# Altium PCB PCB.PcbDoc
Units mm, origin at the board's own origin, x right, y up, seen from the top; angles counter-clockwise.
Board outline 53.52 x 43.69 mm, 2 copper layers (Top Layer, Bottom Layer); 17 components, 12 nets, 45 pads, 0 vias.
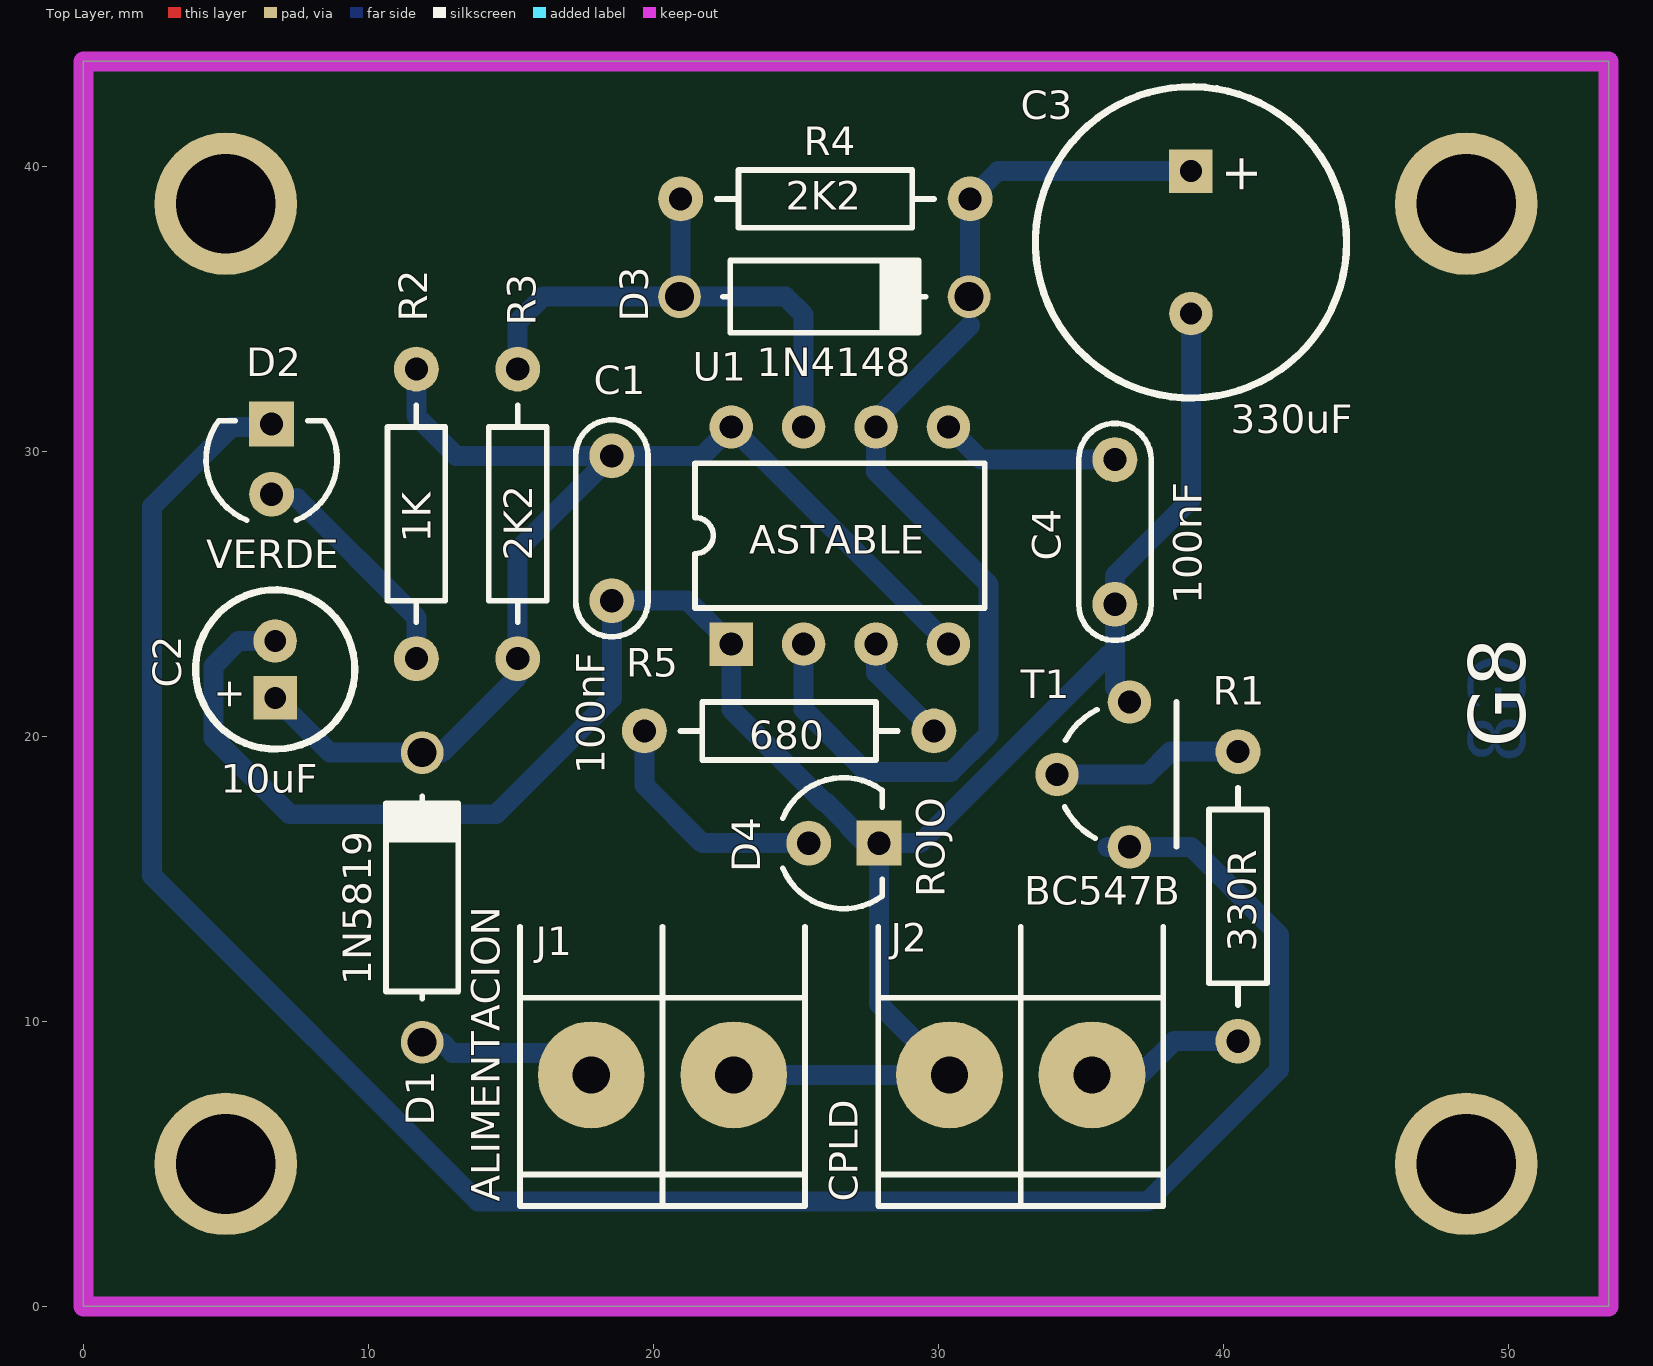
[diagram p0: Top Layer view]
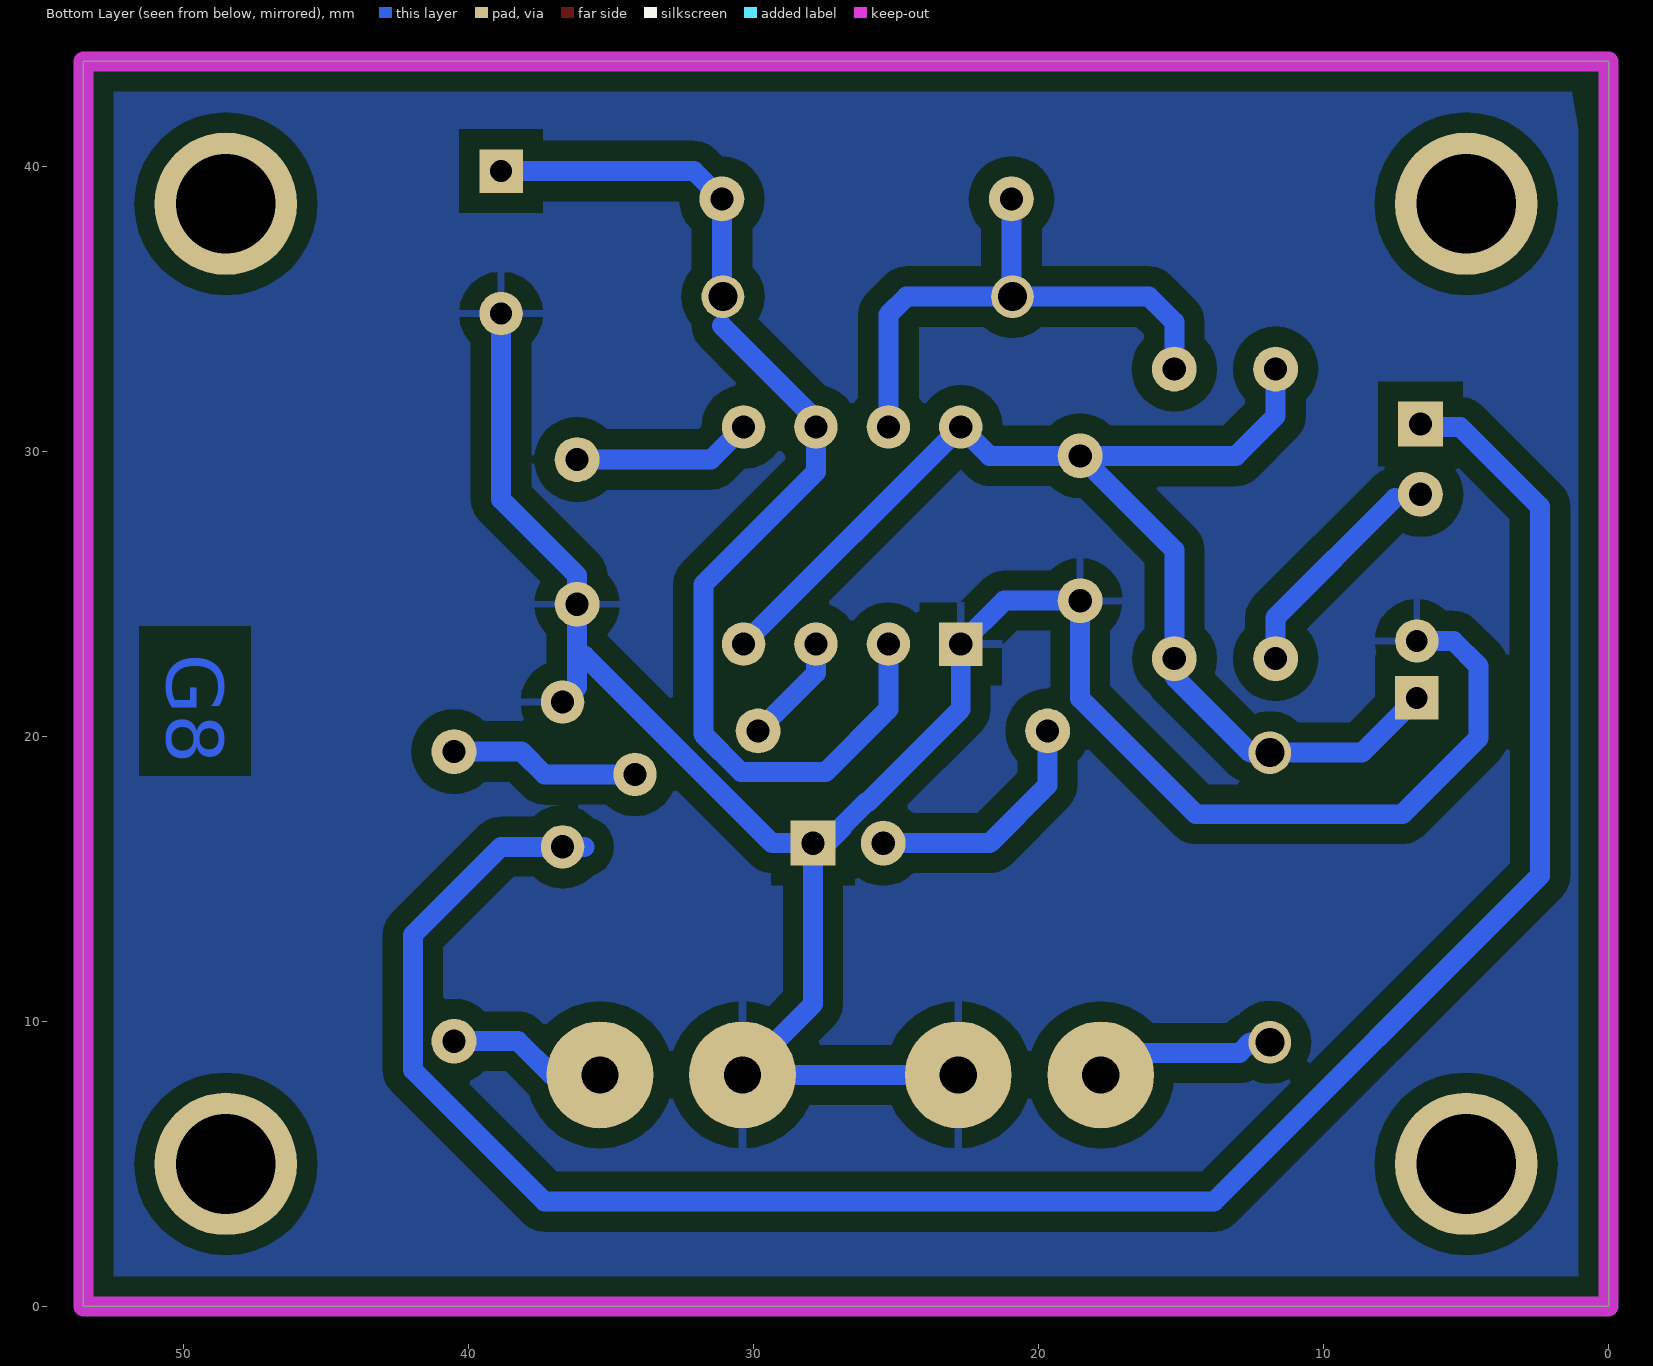
[diagram p1: Bottom Layer view, seen from below]
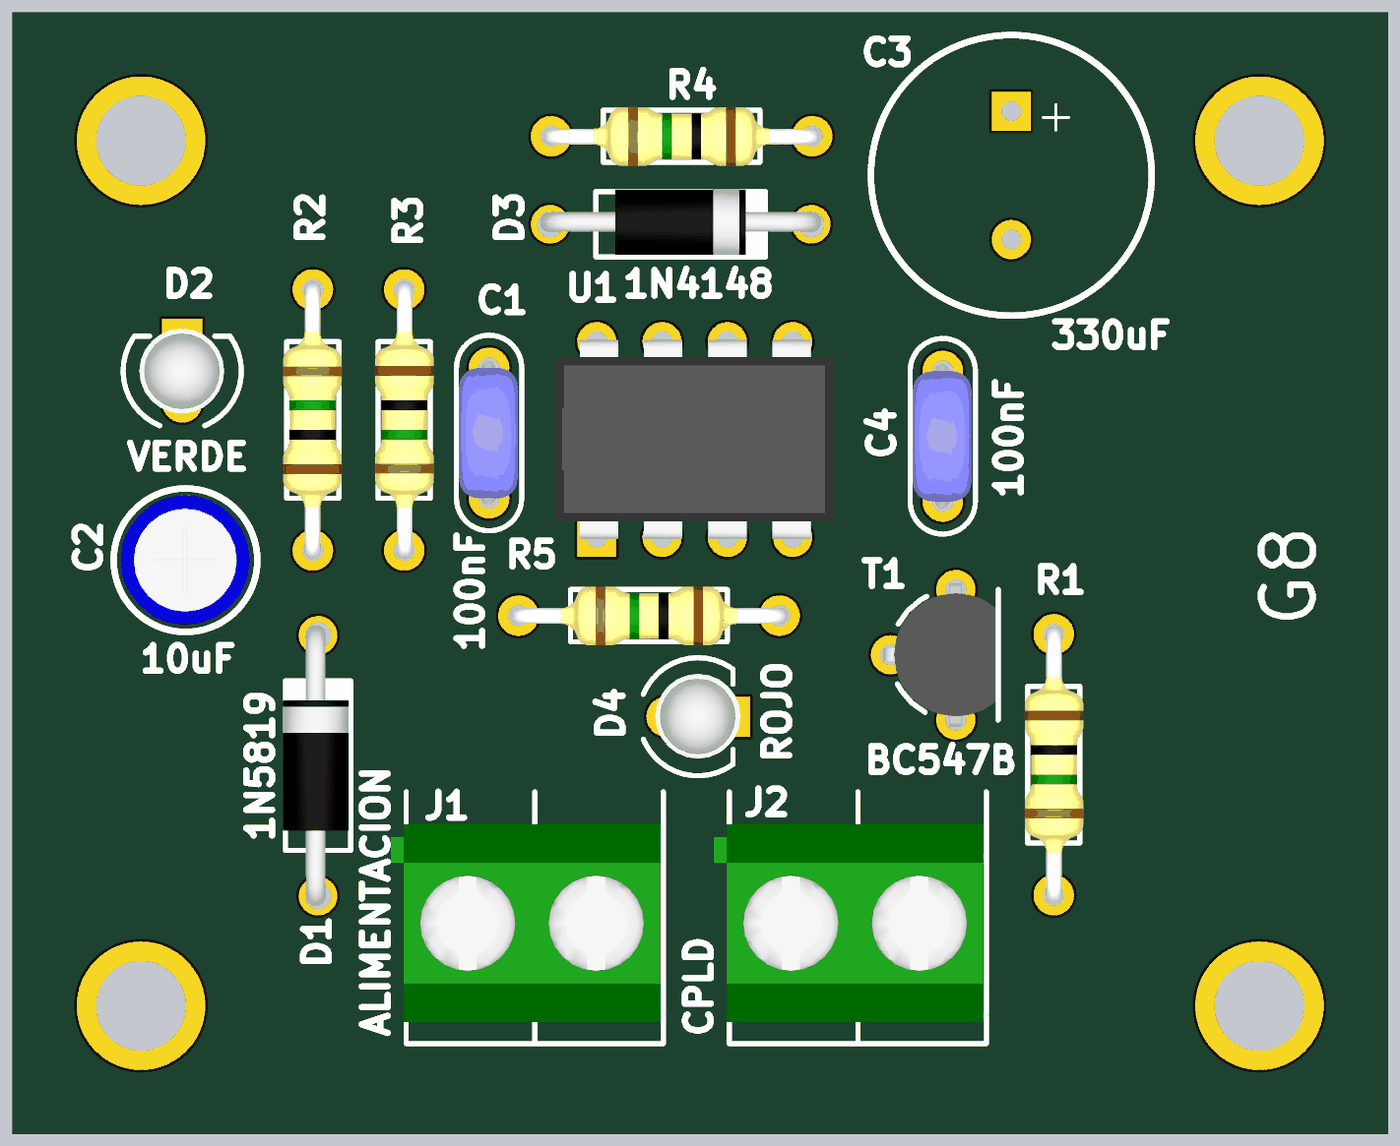
[diagram p2: 3D render of the assembled board from above, using the file's embedded part models]

## Layer stack, top to bottom
Top Layer: signal copper 0.0356
Dielectric: dielectric 0.32, FR-4, Dk 4.8
Bottom Layer: signal copper 0.0356

## Board outline
0,0 0,43.688 53.518,43.688 53.518,0

## Design rules (kind name [scope] priority, off if disabled: settings)
Clearance POLYGON [InPolygon] p1: gap=0.7
Clearance Clearance_1 [All] p2: gap=0.3
PolygonConnect [All] p1: connectstyle=Relief reliefconductorwidth=0.254 reliefentries=4 polygonreliefangle="90 Angle"
RoutingVias [All] p1: holewidth=0.711 width=1.27 viastyle="Through Hole" minholewidth=0.711 minwidth=1.27 maxholewidth=0.711 maxwidth=1.27
SilkscreenOverComponentPads SilkToSolderMaskClearance [IsPad] p1: minsilkscreentomaskgap=0.254
SolderMaskExpansion [All] p1: expansion=0.102
Width [All] p1: maxlimit=0.7 minlimit=0.254 preferedwidth=0.7 toplayer_maxwidth=0.254 toplayer_prefwidth=0.254 bottomlayer_minwidth=0.7 minimp=50.000000 maximp=50.000000 favimp=50.000000
27 further rules are at their usual default settings.

## Components (designator, comment, footprint, x,y, rotation, side; value= is the part's Value field where it differs from the comment)
C1 "100nF" CAP200 18.542,27.305 r270 top
C2 "10uF" CAP100RP 6.731,22.352 r90 top
C3 "330uF" CAP200RP 38.862,37.338 r270 top
C4 "100nF" CAP200 36.195,27.178 r270 top
D1 "1N5819" DO41 11.887,14.351 r90 top
D2 "VERDE" LED3 6.604,29.718 r90 top
D3 "1N4148" DO41 25.998,35.433 r0 top
D4 "ROJO" LED3 26.67,16.256 r0 top
J1 "ALIMENTACION" BORNERA2 20.32,8.128 r90 top
J2 "CPLD" BORNERA2 32.893,8.128 r90 top
R1 "330R" RES400 40.513,19.468 r270 top
R2 "1K" RES400 11.684,22.733 r90 top
R3 "2K2" RES400 15.24,32.893 r270 top
R4 "2K2" RES400 31.115,38.862 r180 top
R5 "680" RES400 29.845,20.193 r180 top
T1 "BC547B" TO92 35.433,18.669 r270 top
U1 "ASTABLE" DIP8 22.733,23.241 r90 top

## Footprints (in the part's own frame and the unit in brackets; to place one, negate y for a bottom-side part, rotate by r counter-clockwise, add the part's x,y. Pads: shape width x height; smd on the part's side, far side on the other; paste and mask are expansions set on the pad)
BORNERA2 [mm] "Bornera con Tornillos 5mm separación"
  round 3.75 hole 1.3: 1(0,2.5) 2(0,-2.5)
  silkscreen extent -4.6,-5 5.2,5, body extent -3.76,-4.89 3.94,5.61, height 10
CAP100RP [mil] "Body diameter 5mm"
  rect 60x60 hole 30: 1(-39.37,0)
  round 60 hole 30: 2(39.37,0)
  silkscreen extent -110,-110 110,110, body extent -99,-99 99,100, height 454
CAP200 [mil]
  round 62 hole 32: 1(-100,0) 2(100,0)
  silkscreen extent -150,-50 150,50, body extent -110,-46 110,44, height 246
CAP200RP [mil] "Body Diameter 10.33mm"
  rect 60x60 hole 30: 1(-98.43,0)
  round 60 hole 30: 2(98.43,0)
  silkscreen extent -215,-215 215,215, body extent -205,-204 204,205, height 787
DIP8 [mil]
  rect 60x60 hole 32: 1(0,0)
  round 60 hole 32: 2(0,-100) 3(0,-200) 4(0,-300) 5(300,-300) 6(300,-200) 7(300,-100) 8(300,0)
  silkscreen extent 50,-350 250,50, body extent -3,-363 303,63, height 177
DO41 [mm]
  round 1.5 hole 1.016: 1(-5.08,0) 2(5.08,0)
  silkscreen extent -3.56,-1.27 3.56,1.27, body extent -5.46,-1.19 5.46,1.37, height 2.03
LED3 [mil]
  round 62 hole 32: 1(-48,0)
  rect 62x62 hole 32: 2(49,0)
  silkscreen extent -84,-90 54,90, body extent -65,-64 65,65, height 19
RES400 [mil]
  round 62 hole 32: 1(0,0) 2(400,0)
  silkscreen extent 50,-40 350,40, body extent -12,-45 412,46, height 96
TO92 [mil]
  round 60 hole 32: 1(0,-50) 2(100,50) 3(-100,50)
  silkscreen extent -100,-39 100,115, body extent -110,-61 110,110, height 315

## Part data
C1 C4: library part CAP
C2 C3: library part CAPPOL
D1 D3: library part DIODO
D2 D4: library part LED
J1 J2: library part "BORNERA 2"
R1 R2 R3 R4 R5: library part RES
T1: library part "TRANSISTOR NPN"
U1: library part LM555, "Timer"

## Free pads (board coordinates)
  round 5 hole 3.5: 1(5,5) 2(5,38.688) 3(48.518,38.688) 4(48.518,5)

## Nets (pads, with @x,y where several pads share a name; then routed paths per layer and width w, separated by ;. In a path a pad name is that pad's centre, name@x,y a point inside that pad or via, vN(x,y) a via of type N, cw(c..) or ccw(c..) an arc to the next point about the centre after c; other vN are vias at no path point)
2: C3.1 D3.2 R4.1 U1.2 U1.6 | length 39.3
  Bottom Layer w0.7: U1.2 25.273,20.955 27.472,18.756 30.44,18.756 31.765,20.08 31.765,25.336 27.813,29.288 U1.6 27.813,31.115 31.115,34.417 ; D3.2@31.369,35.433 31.115,35.687 R4.1 32.091,39.838 C3.1
GND: C1.2 C2.2 C3.2 C4.2 D4.2 J1.2 J2.1 T1.3 U1.1 | length 82.3
  Bottom Layer w0.7: C2.2 5.445,23.352 4.572,22.479 4.572,19.939 7.239,17.272 14.478,17.272 18.542,21.336 C1.2 21.209,24.765 U1.1 22.733,20.955 25.995,17.693 26.046,17.693 26.888,16.851 26.888,16.8 27.432,16.256 D4.2 ; J1.2@22.82,8.89 23.582,8.128 J2.1 27.915,10.606 D4.2 ; 35.941,22.842 29.355,16.256 D4.2 ; T1.3 36.195,21.717 C4.2 36.195,25.654 38.862,28.321 C3.2
NetC4_1: C4.1 U1.5 | length 6.3
  Bottom Layer w0.7: U1.5 31.496,29.718 C4.1
NetD1_1: D1.1 J1.1 | length 5.4
  Bottom Layer w0.7: D1.1@12.573,9.271 12.954,8.89 J1.1@17.82,8.89
NetD2_1: D2.1 R2.1 | length 7.4
  Bottom Layer w0.7: 7.493,28.372 11.684,24.181 R2.1
NetD2_2: D2.2 T1.2 | length 76.3
  Bottom Layer w0.7: D2.2@6.35,30.861 5.207,30.861 2.413,28.067 2.413,15.113 13.843,3.683 37.338,3.683 41.95,8.295 41.95,13.041 38.862,16.129 T1.2@35.941,16.129
NetD3_1: D3.1 R3.1 R4.2 U1.7 | length 19.5
  Bottom Layer w0.7: R3.1 15.24,34.544 16.129,35.433 D3.1 ; R4.2 20.955,35.687 21.209,35.433 24.638,35.433 25.273,34.798 U1.7
NetD4_1: D4.1 R5.2 | length 8.5
  Bottom Layer w0.7: R5.2 19.685,18.288 21.717,16.256 D4.1
NetJ2_2: J2.2 R1.2 | length 5.6
  Bottom Layer w0.7: J2.2 37.084,8.128 38.264,9.308 R1.2
NetR1_1: R1.1 T1.1 | length 6.7
  Bottom Layer w0.7: T1.1 37.338,18.669 38.137,19.468 R1.1
NetR5_1: R5.1 U1.3 | length 3.9
  Bottom Layer w0.7: U1.3 27.813,22.225 R5.1
VCC: C1.1 C2.1 D1.2 R2.2 R3.2 U1.4 U1.8 | length 43.5
  Bottom Layer w0.7: C2.1 8.652,19.431 12.573,19.431 R3.2@15.24,22.098 ; R2.2 11.684,31.242 13.081,29.845 C1.1 ; R3.2@15.24,22.606 15.24,26.543 C1.1 ; U1.4 U1.8 21.717,29.845 C1.1

## Polygon pours and split planes (outlines as drawn)
GND on Bottom Layer "POLYGON" (solid, remove dead copper, pour order 1000): 1.753,45.11 56.54,45.11 56.617,45.034 56.032,44.45 56.032,0.559 -4.851,0.559 -6.731,-1.321

## Keep-outs
Keep-Out Layer:
  the board outline again, w0.7

## Other copper
Bottom Layer:
  text "G8" at 50.597,22.911 h2 r90

## Silkscreen, mask and mechanical layers (free items; w line width, h text height)
Top Overlay:
  text "G8" at 50.597,19.609 h2 r90

## Text inside footprints (layer, text, board x,y; h text height)
C2: Top Overlay "+" at 5.563,20.904 h1.02 r90
C3: Top Overlay "+" at 40.107,40.462 h1.27 r270